# EAGLE board przetwornice (EAGLE 5.06)
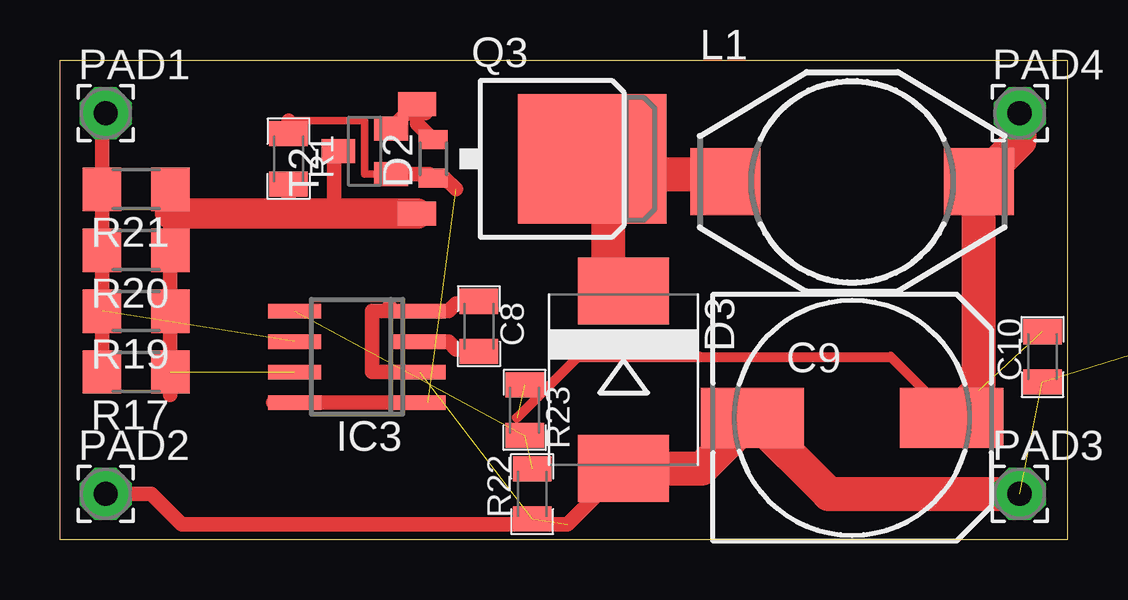
[diagram p0: board, top side]
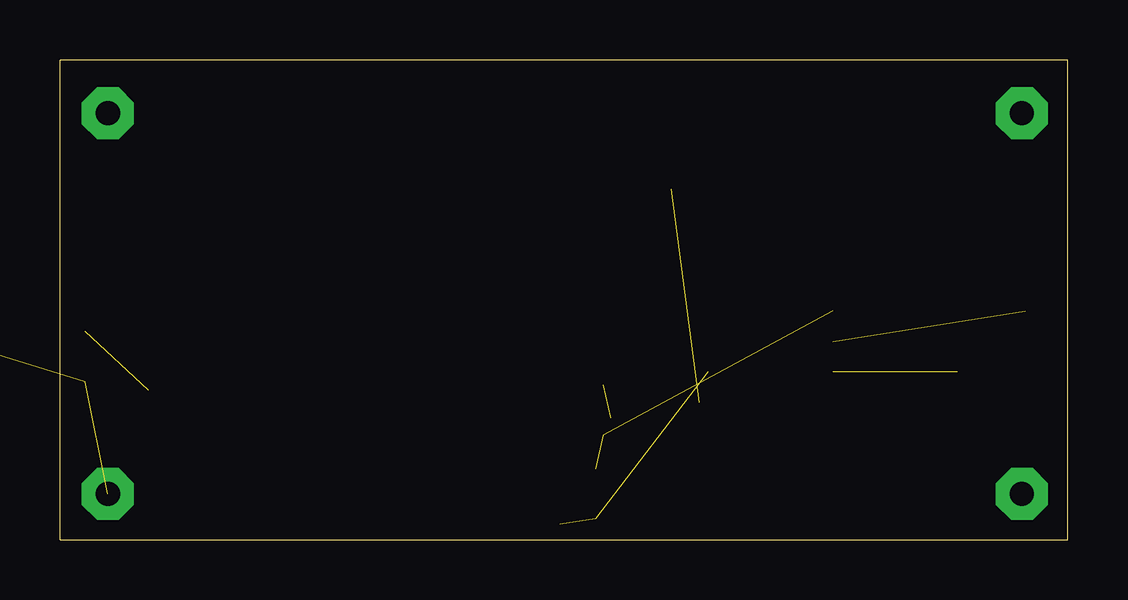
[diagram p1: board, bottom side, seen from below]

Size 42 x 20 mm. Coordinates in mm from the lower left corner, seen from the top.
Outline: 0,0 0,20 42,20 42,0 0,0
Copper layers (1*16): Top 0.035mm / dielectric 1.5mm / Bottom 0.035mm
Design rules "default *": minimum track width 10mil, minimum drill 0.5mm, track to track 8mil, track to pad 8mil, pad to pad 8mil, via to via 8mil, smd to smd 8mil, copper to edge 40mil, drill to drill 8mil, minimum pad ring 10mil, minimum via ring 8mil, stop-mask expansion 4mil, vias tented up to drill 0mil, thermal gap 10mil

## Footprints (pad centres in the part's own frame; a part is rotated, then mirrored left to right if it is on the bottom)
0805 = smd 1.044 x 1.6: 1 -1.048,0; 2 1.048,0
150CLZ-1014 = smd 4.3 x 2.5: + 4.15,0; - -4.15,0
E5-10,5 = drill 1.016 pad 2.54 round: + -2.54,0 | drill 1.016 pad 2.54 octagon: - 2.54,0
MICROMELF-R = smd 0.8 x 1.2: A 0.8,0; C -0.8,0
SMC = smd 2.8 x 3.8: A 3.7,0; C -3.7,0
SOD80C = smd 1.4 x 1.8: A 1.7,0; C -1.7,0
SMB = smd 2.4 x 2.4: A 2.2,0; C -2.2,0
TE5 = drill 1.016 long: 1 -2.54,0; 2 2.54,0
SOIC8 = smd 0.6 x 2.2: 1 -1.905,-2.6; 2 -0.635,-2.6; 3 0.635,-2.6; 4 1.905,-2.6; 5 1.905,2.6; 6 0.635,2.6; 7 -0.635,2.6; 8 -1.905,2.6
DO3316P = smd 2.92 x 2.79: 1 -5.28,0; 2 5.28,0
2,15/1,0 = drill 1.016 pad 2.159 octagon: 1 0,0
D-PAK_TO252AA = smd 1 x 1.6: 1 -2.28,-4.8; 3 2.28,-4.8 | smd 5.4 x 6.2: 4 0,2.5
R1206 = smd 1.6 x 1.803: 1 -1.422,0; 2 1.422,0
TO220CS = drill 1.016 long: A 0,-2.54; C -2.54,-2.54; G 2.54,-2.54
SOT23-BEC = smd 1 x 1.4: B -0.95,-1.1; C 0,1.1; E 0.95,-1.1

## Placement (x,y rotation side)
C8  [0805]  17.46,8.89 270 top
C9  [150CLZ-1014]  33.02,5.08 0 top
C10  [0805]  40.96,7.62 90 top
C11  [0805]  87.63,19.68 270 bottom  (outside the outline)
C12  [E5-10,5]  93.34,15.24 90 top  (outside the outline)
C13  [0805]  90.81,15.24 270 bottom  (outside the outline)
D2  LL4148  [MICROMELF-R]  15.56,15.88 90 top
D3  [SMC]  23.5,6.67 270 top
D5  5V6  [SOD80C]  82.55,-22.23 180 bottom  (outside the outline)
D7  [SMB]  83.82,23.5 180 bottom  (outside the outline)
F1  [TE5]  83.82,-15.24 0 top  (outside the outline)
IC3  MC34063AD  [SOIC8]  12.38,7.62 90 top
IC4  MC34063AD  [SOIC8]  83.82,17.78 180 bottom  (outside the outline)
L1  [DO3316P]  33.02,14.92 0 top
L2  [DO3316P]  92.08,27.3 270 bottom  (outside the outline)
PAD1  [2,15/1,0]  1.91,17.78 0 top
PAD2  [2,15/1,0]  1.91,1.91 0 top
PAD3  [2,15/1,0]  40.01,1.91 0 top
PAD4  [2,15/1,0]  40.01,17.78 0 top
Q3  IRF9540  [D-PAK_TO252AA]  19.68,15.88 270 top
R1  2k2  [0805]  9.53,15.88 270 top
R15  1k  [0805]  82.55,-24.13 180 bottom  (outside the outline)
R17  ??  [R1206]  3.17,6.99 180 top
R19  ??  [R1206]  3.17,9.53 180 top
R20  ??  [R1206]  3.17,12.06 180 top
R21  ??  [R1206]  3.17,14.61 180 top
R22  [0805]  19.68,1.91 90 top
R23  [0805]  19.37,5.4 270 top
R24  ??  [R1206]  83.19,6.99 180 bottom  (outside the outline)
R25  ??  [R1206]  83.19,4.45 180 bottom  (outside the outline)
R26  ??  [R1206]  83.19,12.06 180 bottom  (outside the outline)
R27  ??  [R1206]  83.19,9.53 180 bottom  (outside the outline)
R29  [0805]  87.63,16.51 270 bottom  (outside the outline)
R30  [0805]  87.63,12.7 90 bottom  (outside the outline)
T1  BTW58  [TO220CS]  83.82,-21.59 180 top  (outside the outline)
T2  MMBT3904  [SOT23-BEC]  12.7,16.19 90 top

## Library data of the parts
C8 C10 C11 C13 R1 R15 R22 R23 R29 R30 = barobot
C9 C12 = rcl
D2 D3 D5 D7 = diode
F1 = fuse
IC3 IC4 = mc34063
L1 L2 = inductor-coilcraft
PAD1-PAD4 = wirepad
Q3 = transistor-power
R17 R19-R21 R24-R27 = resistor
T1 = triac
T2 = transistor

## Nets
GND: C8.1 C9.- C10.1 C11.1 C12.- C13.1 D3.A D5.A D7.A IC3.2 IC3.4 IC4.4 PAD2.1 PAD3.1 R22.1 R29.1 T1.A
N$1: D2.C IC3.1 IC3.8 R1.1 T2.B
N$2: IC3.6 PAD1.1 R17.2 R19.2 R20.2 R21.2
N$3: IC4.6 R24.2 R25.2 R26.2 R27.2
N$16: IC3.7 Q3.3 R1.2 R17.1 R19.1 R20.1 R21.1 T2.C
N$23: IC3.5 R22.2 R23.2
N$29: C8.2 IC3.3
N$30: IC4.1 IC4.7 IC4.8 R24.1 R25.1 R26.1 R27.1
N$31: IC4.5 R29.2 R30.2
N$32: D2.A Q3.1 T2.E
N$33: C9.+ C10.2 L1.2 PAD4.1 R23.1
N$34: D3.C L1.1 Q3.4
N$44: C11.2 IC4.3
N$47: D5.C R15.1 T1.G
N$52: C12.+ C13.2 L2.2 R30.1
N$53: D7.C IC4.2 L2.1
VCC: F1.2 R15.2 T1.C

## Tracks (layer width: path | path; a pad name or v marks a point on that pad's centre or on a via)
GND  (11 unrouted)
  Top 0.61: C8.1 17.37,9.84 16.83,9.84 16.51,9.84 16.19,9.53 IC3.4 13.97,9.53 | IC3.2 13.02,6.99 13.02,8.57 13.02,9.53 13.97,9.53 | 13.97,9.53 13.75,9.75 | PAD2.1 3.81,1.91 5.08,0.64 21.16,0.64 D3.A
  Top 1.422: D3.A 26.76,2.97 C9.- 32.05,1.91 PAD3.1
N$1  (1 unrouted)
  Top 0.305: T2.B 12.7,15.24 12.7,17.46 9.53,17.46 | IC3.8 IC3.1 15.34,5.71
  Top 0.61: IC3.1 IC3.8 8.89,5.71 | T2.B 15.39,15.24 D2.C 16.04,15.07 16.51,14.61 | R1.1 9.53,17.46
N$2  (1 unrouted)
  Top 0.61: R17.2 R19.2 R20.2 R21.2 1.75,17.63 PAD1.1
N$3  (4 unrouted)
N$16  (1 unrouted)
  Top 0.305: 11.21,16.19 T2.C
  Top 0.61: 4.45,14.76 R21.1 R20.1 R19.1 R17.1 4.6,6.03 | 11.21,16.19 11.43,16.19 11.43,13.6 | 9.53,13.6 R1.2 | Q3.3 14.92,13.56
  Top 1.27: Q3.3 11.43,13.6 9.53,13.6 4.6,13.6 R21.1
N$23  (2 unrouted)
N$29
  Top 0.61: IC3.3 16.19,8.26 16.51,7.94 17.37,7.94 C8.2
N$30  (6 unrouted)
N$31  (2 unrouted)
N$32
  Top 0.61: D2.A 14.88,17.35 Q3.1 14.88,18.14 15.24,17.78 14.44,17.78 T2.E
N$33  (2 unrouted)
  Top 0.406: C9.+ 34.63,7.62 26.67,7.62 21.59,7.62 19.05,5.08
  Top 1.422: C9.+ 38.3,6.21 L1.2 40.01,16.63 PAD4.1
N$34
  Top 1.422: D3.C 22.86,11 22.86,15.24 22.23,15.88 Q3.4 22.82,15.24 27.94,15.24 27.74,15.04 L1.1
N$44  (1 unrouted)
N$47  (2 unrouted)
N$52  (3 unrouted)
N$53  (2 unrouted)
VCC  (2 unrouted)